# Altium PCB PCB1.PcbDoc
Units mil, origin at the board's own origin, x right, y up, seen from the top; angles counter-clockwise.
Board outline 1210 x 2270 mil, 2 copper layers (Top Layer, Bottom Layer); 36 components, 25 nets, 120 pads, 28 vias.
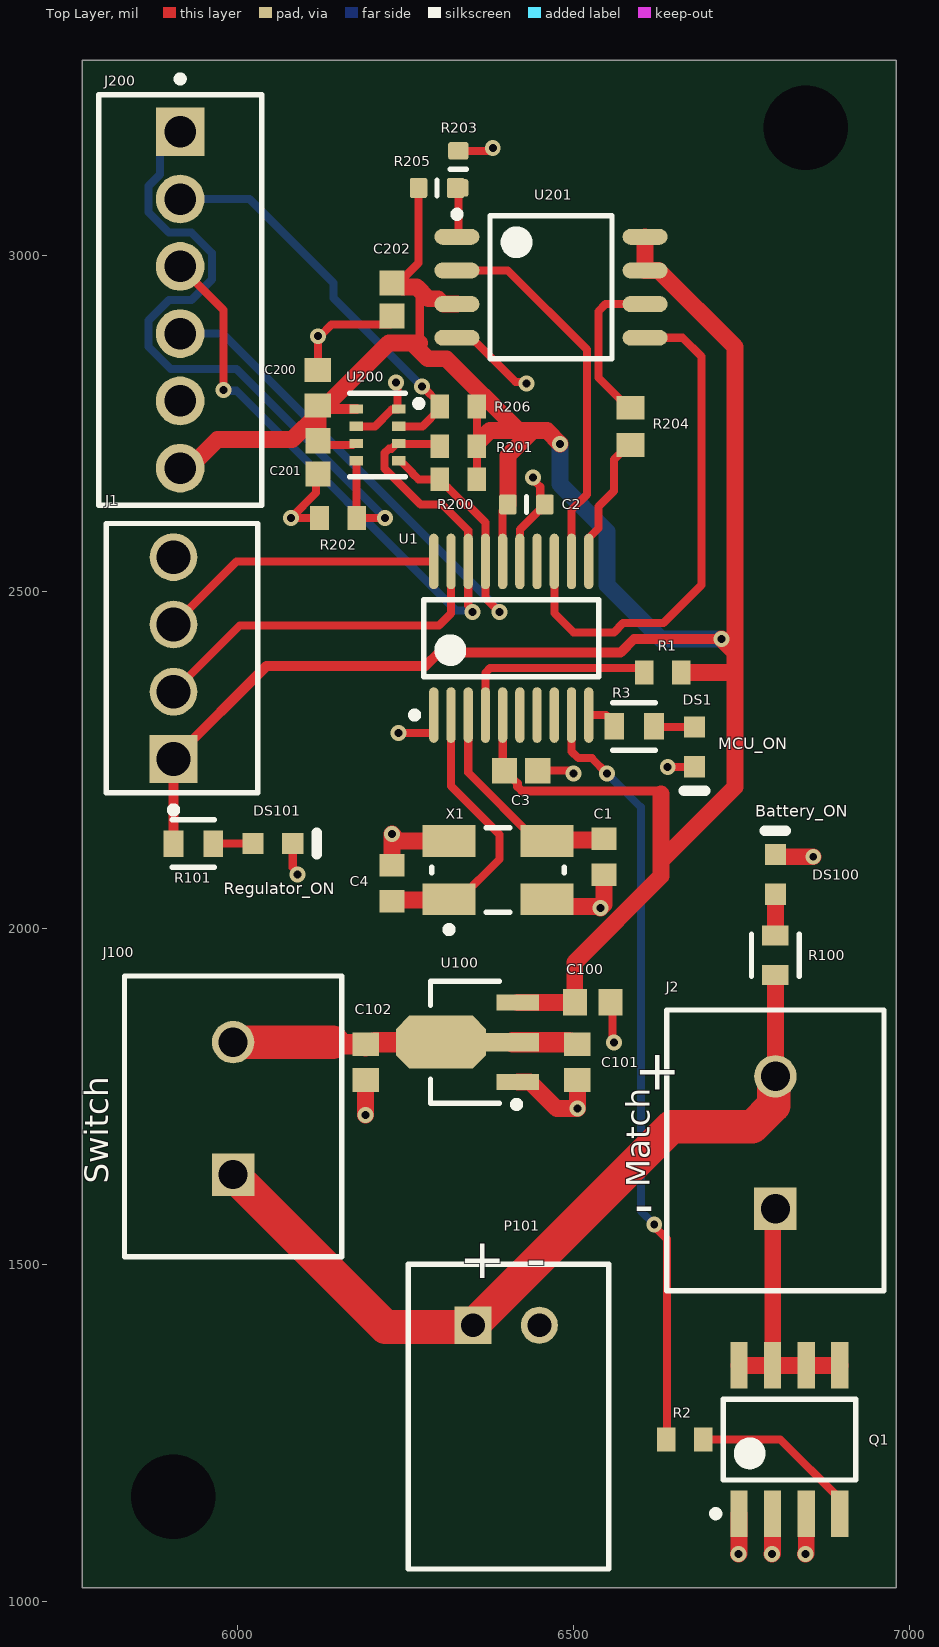
[diagram p0: Top Layer view]
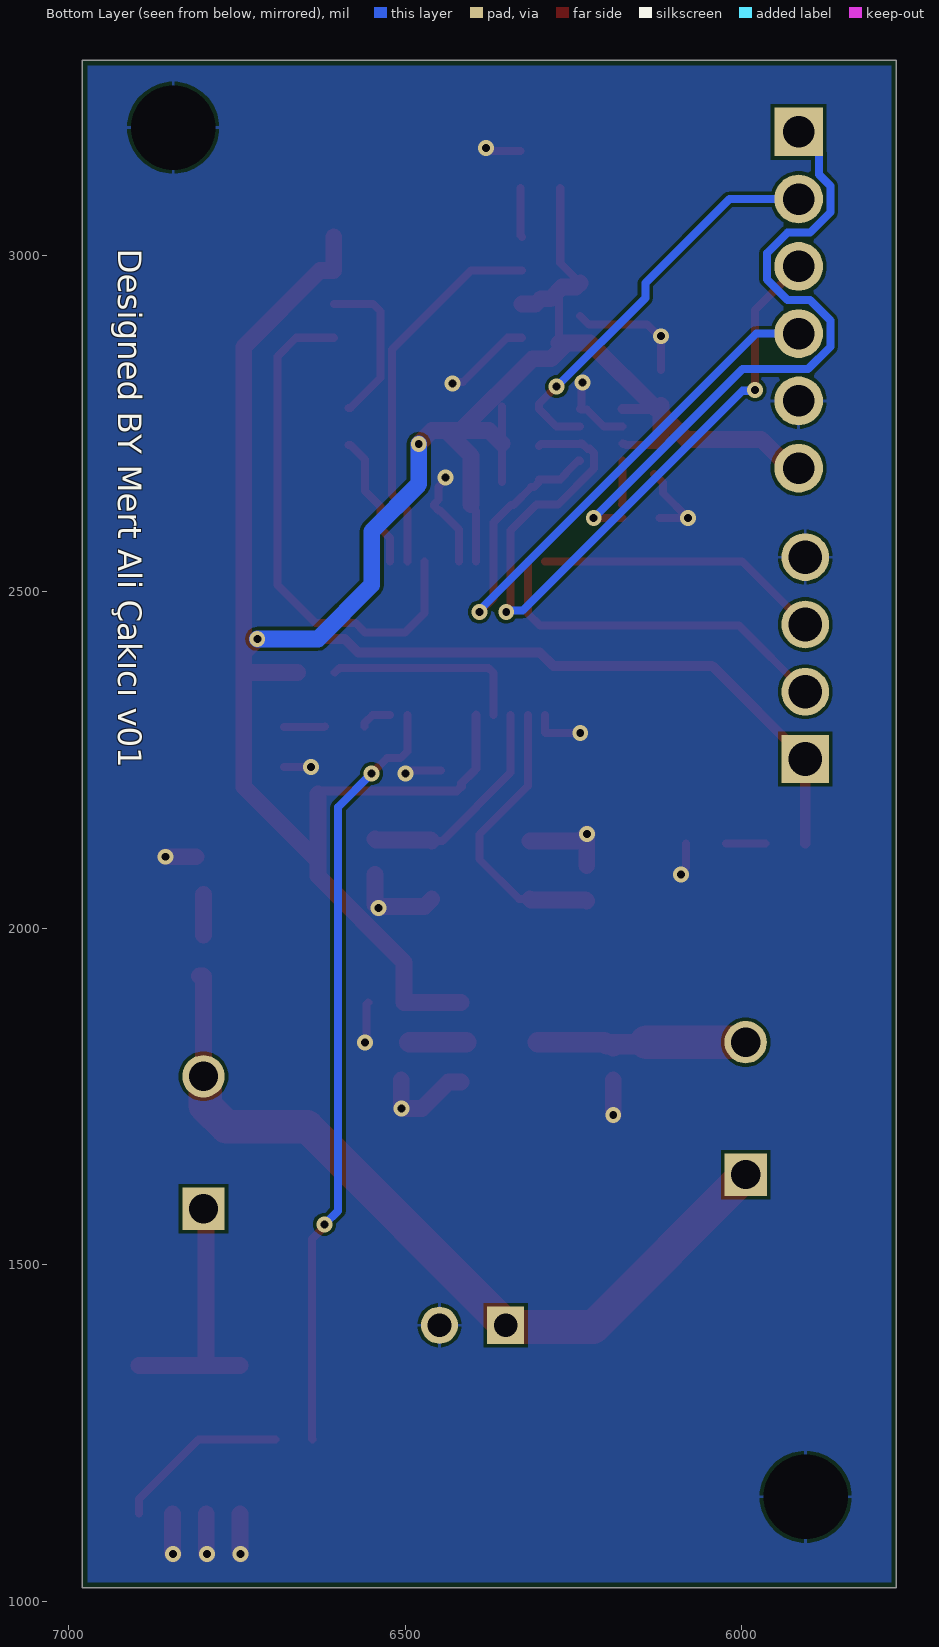
[diagram p1: Bottom Layer view, seen from below]
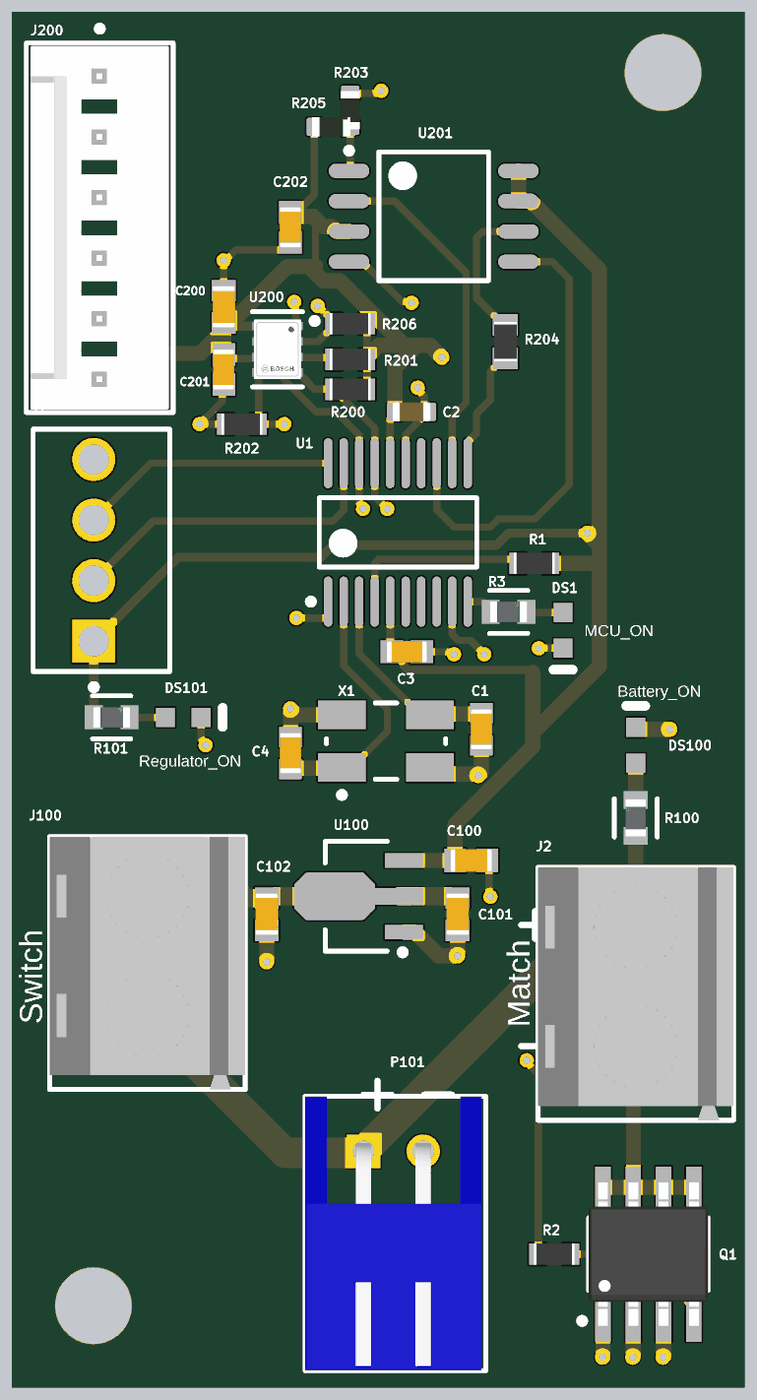
[diagram p2: 3D render of the assembled board from above, using the file's embedded part models]

## Layer stack, top to bottom
Top Solder: solder mask 0.4, Solder Resist, Dk 3.5
Top Layer: signal copper 1.4
Dielectric 1: dielectric 12.6, FR-4, Dk 4.8
Bottom Layer: signal copper 1.4
Bottom Solder: solder mask 0.4, Solder Resist, Dk 3.5

## Board outline
5770,1020 5770,3290 6980,3290 6980,1020

## Design rules (kind name [scope] priority, off if disabled: settings)
BoardOutlineClearance [All] p1: gap=7.87 ignorepadtopadclearanceinfootprint=FALSE
Clearance [All] p1: gap=5 ignorepadtopadclearanceinfootprint=FALSE except(9.84: Arc-Hole Track-Hole SMDPad-Hole THPad-Hole Via-Hole Fill-Hole Poly-Hole Region-Hole Text-Hole)
ComponentClearance [All] p1: gap=5 collisioncheckmode=3 verticalgap=5 showdistances=TRUE
DiffPairsRouting [All] p1: maxlimit=10 minlimit=5 mostfreqgap=5 toplayer_minwidth=5 toplayer_maxwidth=1000 toplayer_prefwidth=5 bottomlayer_minwidth=5 bottomlayer_maxwidth=1000 bottomlayer_prefwidth=5 maxuncoupledlength=500
Height [All] p1: minheight=0 maxheight=71497.94 prefheight=500
HoleSize [All] p1: absolutevalues=TRUE maxlimit=248.03 minlimit=11.81 maxpercent=80.000 minpercent=20.000
HoleToHoleClearance [All] p1: gap=9.84 allowstackedmicrovias=FALSE
MinimumAnnularRing [All] p1: minimumring=3
MinimumSolderMaskSliver [All] p1: minsoldermaskwidth=0
PlaneClearance [All] p1: clearance=5
PlaneConnect PlaneConnectPowerPads [InPadClass('PowerPads')] p1: planeconnectstyle=Direct reliefexpansion=20 reliefentries=4 reliefconductorwidth=10 reliefairgap=10
PlaneConnect [All] p2: pad.planeconnectstyle=Relief pad.reliefexpansion=11.81 pad.reliefentries=4 pad.reliefconductorwidth=5 pad.reliefairgap=5 via.planeconnectstyle=Direct via.reliefexpansion=11.81 via.reliefentries=4 via.reliefconductorwidth=5 via.reliefairgap=5
PolygonConnect PolygonConnectPowerPads [All vs (InPadClass('PowerPads'))] p1: connectstyle=Direct reliefconductorwidth=10 reliefentries=4 polygonreliefangle="90 Angle" airgapwidth=10
PolygonConnect [All] p2: thpad.connectstyle=Relief thpad.reliefconductorwidth=5 thpad.reliefentries=4 thpad.polygonreliefangle="90 Angle" thpad.airgapwidth=5 smdpad.connectstyle=Relief smdpad.reliefconductorwidth=5 smdpad.reliefentries=4 smdpad.polygonreliefangle="90 Angle" smdpad.airgapwidth=5 via.connectstyle=Direct via.reliefconductorwidth=5 via.reliefentries=4 via.polygonreliefangle="90 Angle" via.airgapwidth=5
RoutingVias [All] p1: holewidth=11.81 width=23.62 viastyle="Through Hole" minholewidth=11.81 minwidth=23.62 maxholewidth=23.62 maxwidth=259.84
SilkToSilkClearance [All] p1: silktosilkclearance=0
SilkToSolderMaskClearance [IsPad] p1: minsilkscreentomaskgap=5 clearancetoexposedcopper=TRUE
SolderMaskExpansion [All] p1: expansion=2.95 istentingtop=FALSE
SupplyNets "Schematic Supply Nets_1" [InNet('GND')] p1: voltage=0.000
SupplyNets "Schematic Supply Nets" [InNet('VCC')] p2: voltage=0.000
Width [All] p1: maxlimit=1000 minlimit=5 preferedwidth=5 minimp=50.000000 maximp=50.000000 favimp=50.000000
20 further rules are at their usual default settings.

## Classes and differential pairs
component class Sensor: "\"" C200 C201 C202 J200 R200 R201 R202 R203 R204 R205 R206 U200 U201
component class POWER: "\"" C100 C101 C102 DS100 DS101 J100 P101 R100 R101 U100
component class MCU: "\"" C1 C2 C3 C4 DS1 J1 J2 Q1 R1 R2 R3 U1 X1

## Components (designator, comment, footprint, x,y, rotation, side; value= is the part's Value field where it differs from the comment)
C1 "22 pF" CAPC1608X90X35NL10T15 6545.28,2106.3 r90 top
C2 "Capacitor 10µF +/-20% 10V 0603" CAPC0603(1608)100_L 6430,2630 r0 top value=10µF
C3 "Capacitor 100 nF +/-10% 50 V 0603" CAPC1608X90X40NL10T20 6422.24,2234.25 r0 top value=100nF
C4 "22 pF" CAPC1608X90X35NL10T15 6230.31,2066.93 r270 top
C100 "Capacitor 1uF +/- 10% 16V 0603" CAPC1608X90X35NL15T15 6528.54,1889.76 r0 top value=1µF
C101 "Capacitor 1uF +/- 10% 16V 0603" CAPC1608X90X35NL15T15 6505.91,1801.18 r270 top value=1µF
C102 "Capacitor 1uF +/- 10% 16V 0603" CAPC1608X90X35NL15T15 6190.94,1801.18 r270 top value=1µF
C200 "Capacitor 1uF +/- 10% 16V 0603" CAPC1608X90X35NL15T15 6120,2803.43 r90 top value=1µF
C201 "Capacitor 100 nF +/-10% 50 V 0603" CAPC1608X90X40NL10T20 6120,2700 r270 top value=100nF
C202 "Capacitor 100 nF +/-10% 50 V 0603" CAPC1608X90X40NL10T20 6230,2934.61 r270 top value=100nF
DS1 "19-217/R6C-AL1M2VY/3T" EVRL-0603-2_V 6680,2269.53 r270 top
DS100 "19-217/R6C-AL1M2VY/3T" EVRL-0603-2_V 6800,2080 r90 top
DS101 "19-217/R6C-AL1M2VY/3T" EVRL-0603-2_V 6053.15,2125.98 r0 top
J1 "640456-4" TECO-640456-4 5905.51,2401.57 r270 top
J2 "282836-2" TECO-282836-2_V 6800,1681.57 r90 top
J100 "282836-2" TECO-282836-2_V 5994.09,1732.28 r90 top
J200 "22-29-2061" FP-22-29-2061-MFG 5915.35,2933.86 r90 top
P101 "S2B-XH-A(LF)(SN)" JST-S2B-XH-A(LF)(SN)_V 6400,1410 r0 top
Q1 "FDS6690A" FAIR-SOIC-8_V 6820.87,1240.16 r90 top
R1 "Resistor 10k +/-1% 0603 100 mW" RESC1608X55X25NL10T15 6632.44,2380 r0 top value=10k
R2 "Resistor 10k +/-1% 0603 100 mW" RESC1608X55X25NL10T15 6665.35,1240.16 r0 top value=10k
R3 "220" FP-CRCW0603-e3-MFG 6590,2300 r0 top
R100 "220" FP-CRCW0603-e3-MFG 6800,1960 r90 top
R101 "220" FP-CRCW0603-e3-MFG 5935.04,2125.98 r0 top
R200 "Resistor 10k +/-1% 0603 100 mW" RESC1608X55X25NL10T15 6328.74,2667.32 r180 top value=10k
R201 "Resistor 10k +/-1% 0603 100 mW" RESC1608X55X25NL10T15 6328.74,2716.54 r180 top value=10k
R202 "Resistor 10k +/-1% 0603 100 mW" RESC1608X55X25NL10T15 6150,2610 r180 top value=10k
R203 "Jumper 0603" RESC0603(1608)_L 6328.74,3127.95 r90 top value=0
R204 "Resistor 22R +/-1% 0603 100 mW" RESC1609X50X30ML08T20 6584.65,2746.06 r270 top value=22
R205 "DNP" RESC0603(1608)_L 6297.24,3100.39 r180 top value=0
R206 "Resistor 10k +/-1% 0603 100 mW" RESC1608X55X25NL10T15 6328.74,2775.59 r180 top value=10k
U1 "STM32F042F6P6" STM-TSSOP20_M 6407.48,2431.1 r90 top
U100 "MCP1700T-3302E/MB" SOT-89-MB3_M 6338.58,1830.71 r180 top
U200 "BMP280" FP-BMP280-MFG 6208.66,2733.27 r0 top
U201 "W25Q16DVSSIG" WINB-W25Q16DVSSIG-8_N 6466.54,2952.76 r0 top
X1 "20 MHZ" TXC-7B-4_V 6387.8,2086.61 r0 top

## Footprints (in the part's own frame and the unit in brackets; to place one, negate y for a bottom-side part, rotate by r counter-clockwise, add the part's x,y. Pads: shape width x height; smd on the part's side, far side on the other; paste and mask are expansions set on the pad)
CAPC0603(1608)100_L [mm] "Chip Capacitor, Body 1.6x0.8mm, Height 1.0mm, IPC High Density"
  rrect25% 0.66x0.76 smd: 1(-0.7,0) 2(0.7,0)
  silkscreen extent 0,-0.3 0,0.3, body extent -0.8,-0.4 0.8,0.4, height 0.95
CAPC1608X90X35NL10T15 [mm] "Chip Capacitor, 2-Leads, Body 1.7x0.9mm, IPC Medium Density"
  rect 0.85x0.95 smd: 1(-0.675,0) 2(0.675,0)
  body extent -0.85,-0.45 0.85,0.45, height 0.9
CAPC1608X90X35NL15T15 [mm] "Chip Capacitor, 2-Leads, Body 1.75x0.95mm, IPC Medium Density"
  rect 0.9x1 smd: 1(-0.675,0) 2(0.675,0)
  body extent -0.87,-0.48 0.87,0.48, height 0.9
CAPC1608X90X40NL10T20 [mm] "Chip Capacitor, 2-Leads, Body 1.70x0.90mm, IPC Medium Density"
  rect 0.95x0.95 smd: 1(-0.625,0) 2(0.625,0)
  body extent -0.85,-0.45 0.85,0.45, height 0.9
EVRL-0603-2_V [mm] "SMD, 2-Leads, Body 1.6x0.8mm"
  rect 0.8x0.8 smd: 1(-0.75,0) 2(0.75,0)
  silkscreen extent 1.65,-0.4 1.65,0.4, body extent -0.8,-0.4 0.8,0.4, height 0.5
FAIR-SOIC-8_V [mm] "SOIC, 8-Leads, Body 5x4mm, Pitch 1.27mm"
  rect 1.75x0.65 smd: 1(-2.8,1.905) 2(-2.8,0.635) 3(-2.8,-0.635) 4(-2.8,-1.905) 5(2.8,-1.905) 6(2.8,-0.635) 7(2.8,0.635) 8(2.8,1.905)
  silkscreen extent -2.92,-2.5 1.53,2.9, body extent -3,-2.5 3,2.5, height 1.75
FP-22-29-2061-MFG [mm]
  rect 1.84x1.84 hole 1.19 paste-2539.97 mask+0: 1(6.35,0)
  round 1.84 hole 1.19 paste-2539.97 mask+0: 2(3.81,0) 3(1.27,0) 4(-1.27,0) 5(-3.81,0) 6(-6.35,0)
  silkscreen extent -7.75,-3.08 8.47,3.08, body extent -7.85,-3.18 7.85,3.17, height 0.25
FP-BMP280-MFG [mm]
  rect 0.5x0.35 smd paste+0 mask+0: 1(0.8,0.975) 2(0.8,0.325) 3(0.8,-0.325) 4(0.8,-0.975) 5(-0.8,-0.975) 6(-0.8,-0.325) 7(-0.8,0.325) 8(-0.8,0.975)
  silkscreen extent -1.05,-1.58 1.68,1.58, body extent -1.55,-1.8 1.55,1.8, height 0.25
FP-CRCW0603-e3-MFG [mm]
  rect 0.75x1 smd paste+0 mask+0: 1(-0.75,0) 2(0.75,0)
  silkscreen extent -0.8,-0.9 0.8,0.9, body extent -1.22,-0.6 1.22,0.6, height 0.25
JST-S2B-XH-A(LF)(SN)_V [mm] "Header, 2-Leads, Body 7.4x11.5mm, Pitch 2.5mm"
  rect 1.4x1.4 hole 0.9: 1(-1.25,0)
  round 1.4 hole 0.9: 2(1.25,0)
  silkscreen extent -3.7,-9.2 3.87,2.3, body extent -3.7,-9.2 3.7,2.3, height 5.95
RESC0603(1608)_L [mm] "Chip Resistor, Body 1.6x0.8mm, IPC High Density"
  rrect25% 0.66x0.76 smd: 1(-0.7,0) 2(0.7,0)
  silkscreen extent 0,-0.3 0,0.3, body extent -0.8,-0.4 0.8,0.4, height 0.45
RESC1608X55X25NL10T15 [mm] "Chip Resistor, 2-Leads, Body 1.70x0.90mm, IPC Medium Density"
  rect 0.7x0.9 smd: 1(-0.7,0) 2(0.7,0)
  body extent -0.85,-0.45 0.85,0.45, height 0.55
RESC1609X50X30ML08T20 [mm] "Chip Resistor, 2-Leads, Body 1.65x0.95mm, IPC Low Density"
  rect 0.9x1.05 smd: 1(-0.7,0) 2(0.7,0)
  body extent -0.82,-0.48 0.82,0.48, height 0.5
SOT-89-MB3_M [mm] "SOT89, 3-Leads, Body 4.5x2.4 mm, Pitch 1.5mm, Lead Span 4.1mm, IPC Low Density"
  rect 1.6x0.6 smd: 1(-2,1.5) 3(-2,-1.5)
  rect 2x0.7 smd: 2(-1.8,0)
  oct 3.4x2 smd: 2(0.9,0)
  silkscreen extent -2.08,-2.3 1.3,2.47, body extent -1.3,-2.3 1.3,2.3, height 1.6
STM-TSSOP20_M [mm] "SOP, 20-Leads, Body 6.6x4.5mm, Pitch 0.65mm, IPC Low Density"
  oval 2.1x0.35 smd: 1(-2.9,2.925) 2(-2.9,2.275) 3(-2.9,1.625) 4(-2.9,0.975) 5(-2.9,0.325) 6(-2.9,-0.325) 7(-2.9,-0.975) 8(-2.9,-1.625) 9(-2.9,-2.275) 10(-2.9,-2.925) 11(2.9,-2.925) 12(2.9,-2.275) 13(2.9,-1.625) 14(2.9,-0.975) 15(2.9,-0.325) 16(2.9,0.325) 17(2.9,0.975) 18(2.9,1.625) 19(2.9,2.275) 20(2.9,2.925)
  silkscreen extent -3.02,-3.3 1.45,3.77, body extent -2.25,-3.3 2.25,3.3, height 1.2
TECO-282836-2_V [mm] "Female Header, Pitch 5mm, 1 x 2 Position, Height 10mm"
  rect 1.6x1.6 hole 1.1: 1(-2.5,0)
  round 1.6 hole 1.1: 2(2.5,0)
  silkscreen extent -5.6,-4.1 5,4.1, body extent -5.6,-4.1 5,4.1, height 10
TECO-640456-4 [mm] "Through Hole, 4-Leads, Body 10.16x5.72mm, Pitch 2.54mm"
  rect 1.8x1.8 hole 1.27 paste-2539.97: 1(3.81,0)
  round 1.8 hole 1.27 paste-2539.97: 2(1.27,0) 3(-1.27,0) 4(-3.81,0)
  silkscreen extent -5.08,-2.54 5.86,3.18, body extent -5.08,-2.54 5.08,3.18, height 10.03
TXC-7B-4_V [mm] "SMD, 4-Leads, Body 5x3.2mm, Pitch 3.7mm"
  rect 2x1.2 smd: 1(-1.85,-1.1) 2(1.85,-1.1) 3(1.85,1.1) 4(-1.85,1.1)
  silkscreen extent -2.5,-2.37 2.5,1.6, body extent -2.5,-1.6 2.5,1.6, height 1.05
WINB-W25Q16DVSSIG-8_N [mm] "SOIC, 8-Leads, Body 5.4x5.4mm, Pitch 1.27mm, IPC Medium Density"
  oval 1.7x0.6 smd: 1(-3.55,1.905) 2(-3.55,0.635) 3(-3.55,-0.635) 4(-3.55,-1.905) 5(3.55,-1.905) 6(3.55,-0.635) 7(3.55,0.635) 8(3.55,1.905)
  silkscreen extent -3.67,-2.7 2.3,2.88, body extent -2.7,-2.7 2.7,2.7, height 2.16

## Part data
C1 C4: library part CMP-2000-04945-1, "Chip Capacitor, 22 pF, +/- 5%, 50 V, -55 to 125 degC, 0603 (1608 Metric), RoHS, Tape and Reel", Capacitance=22pF, Case Size/Dimension=0603, Dielectric=C0G, Manufacturer=Murata, Package Description="2-Pin Surface Mount Device, Body 1.6 x 0.8 mm", Package Reference=603, Rated Voltage=50V, Tolerance (%)=±5%, Datasheet URL=https://datasheet.ciiva.com/11786/0900766b807a1cab-11786398.pdf, Datasheet Version=Jul-06, Manufacturer URL=http://www.murata.com/
C2: library part CMP-001-00075-4, "Chip Capacitor, 10µF +/-20%, 10V, 0603, Thickness 1 mm", Case/Package=0603, Max Operating Temperature=85°C, Min Operating Temperature=-55°C, Tolerance=10%, Voltage Rating=10V, Mounting Technology=SMT, Pins=2
C3 C201 C202: library part CMP-001-00017-6, "Chip Capacitor, 100 nF, +/- 10%, 50 V, 0603 (1608 Metric)", Capacitor Type=Ceramic, Case/Package=0603, Max Operating Temperature=125°C, Min Operating Temperature=-55°C, Tolerance=10%, Voltage Rating=50V, Mounting Technology=SM, Pins=2, RoHS Compliant=True
C100 C101 C102 C200: library part CMP-001-00004-6, "Chip Capacitor, 1 uF, +/- 10%, 16 V, 0603 (1608 Metric)", Capacitor Type=Ceramic, Case/Package=0603, Max Operating Temperature=125°C, Min Operating Temperature=-55°C, Tolerance=10%, Voltage Rating=16V, Mounting Technology=SM, Pins=2, RoHS Compliant=True
DS1 DS100 DS101: library part CMP-007-00004-2, "Chip LED, Red, 5 V, 25 mA, -40 to 85 degC, 2-Pin SMD (0603), RoHS, Tape and Reel", Case/Package=0603, Colour=Red, Forward Voltage=2.2V, Manufacturer="Everlight Electronics", Package Description="2-Pin Surface Mount Device, Body 1.6 x 0.8 mm", Datasheet URL=https://datasheet.ciiva.com/4688/el-19-217-r6c-al1m2vy-3tpdf-187026-4688713.pdf, Datasheet Version="Rev. 1, 01/2005", Lens Style=Clear, Manufacturer URL=http://www.everlight.com/, Mounting Technology=SM, Package Reference=0603, RoHS Compliant=False
J1: library part CMP-2000-05419-1, "Male Header, Pitch 2.54 mm, 1 x 4 Position, Height 10.03 mm, Tail Length 3.56 mm, RoHS, Bulk", Color=White, Current, Rating="5 /  / A", Flammability Rating=UL94V-0, Manufacturer="TE Connectivity", Temperature, Operating="-55to+105 /  / degC", Voltage, Rating="250 /  / V", Agency Approvals=CSA,UL, Angle=Straight, Brand/Series=MTA-100Series, Color, Housing=White, Connector Type=MTA-100, Contact Centerline Spacing="0.100 /  / in.", Contact Mating Area Plating=Tin, Contact Plating=Tin, Contact Shape=Square, Contact Termination Area Plating=Tin, Datasheet URL=https://datasheet.ciiva.com/16286/eng-ds-82056-mta-0608-16286228.pdf, Datasheet Version=Dec-14, Length, Overall="0.4 /  / \"", Length, Pin="0.14 /  / \"", Length, Terminal Post="0.14 /  / in.", Manufacturer URL=http://www.te.com/, Material, Contact=CopperAlloy, Material, Housing=Polyester, Mount Angle=Vertical, Mounting Hole Size="0.04 /  / \"", Mounting Type=PCMount, Number of Contacts=4, Number of Positions=4, Number of Rows=1, Pin Spacing="0.1 /  / \"", Primary Type=InterconnectSystem, Size, Post="0.025 /  / in.", Special Features=Pinstrip, Standards=RoHSCompliant,ELVCompliant,UL94V-0, Termination=Solder, Type=PCBPlug
J2 J100: library part CMP-1684-00017-1, "Female Header, Pitch 5 mm, 1 x 2 Position, Height 10 mm, Tail Length 3.5 mm, Rohs, Bulk", Color=Green, Current=13.5A, Manufacturer="TE Connectivity", Package Description="Female Header, Pitch 5 mm, 1 x 2 Position, Height 10 mm, Tail Length 3.5 mm", Package Reference=THD, Standard Package=300, Voltage=300V, 3D Model=282836-2.pdf, Category=Connectors,Interconnects, Clamp Material - Plating=Brass-NickelPlated, Contact Material - Plating=Brass-TinPlated, Datasheet URL=http://www.te.com.cn/commerce/DocumentDelivery/DDEController?Action=showdoc&DocId=Catalog+Section%7F1308389_EUROSTYLE_TERMINAL_BLOCKS%7F0607%7Fpdf%7FEnglish%7FENG_CS_1308389_EUROSTYLE_TERMINAL_BLOCKS_0607.pdf%7F282836-2, Dynamic Catalog=BuchananSeries, Family=TerminalBlocks-WiretoBoard, Featured Product=EurostyleTerminalBlockConnectors, Features=Interlocking(Side), Housing Material=Polyamide(PA66),Nylon6/6, Manufacturer URL=http://www.te.com, Mating Orientation=HorizontalwithBoard, Mounting Type=ThroughHole, Number of Levels=1, Other Names="5ULV-02B / A98076", Packaging=Bulk, Pitch="0.197\"(5.00mm)", Positions Per Level=2, Product Training Modules=Wire-to-BoardEurostyleTerminalBlocks, RoHS Information=282836-2StatementofCompliance, Screw Material - Plating=Brass-NickelPlated, Screw Thread=M3, Series=Buchanan, Torque - Screw=0.68Nm(6Lb-In), Wire Gauge=16-30AWG, Wire Termination=Screw-RisingCageClamp
J200: library part CMP-04776-000348-1, "CONN HEADER VERT 6POS 2.54MM", Color=Natural, Contact Resistance=10mR, Current Rating=4A, Flammability Rating="UL94 V-0", Housing Color=White, Insulation Resistance=50GR, Max Operating Temperature=75°C, Min Operating Temperature=0°C, Package Quantity=1000, Voltage Rating=250V, Contact Gender=Male, Contact Material=Brass, Contact Mating Length=0.295inch, Contact Plating=Gold, Contact Type="Male Pin", Depth=5.8mm, Fastening Type=Friction, Gender=Male, Height=11.7mm, Housing Material=Nylon, Lead Free="Lead Free", Length=15.24mm, Max Current Rating=4A, Mount="Through Hole", Number of Contacts=6, Number of Lines=1, Number of Poles=6, Number of Positions=6, Number of Rows=1, Orientation=Straight, Packaging=Bulk, Pitch=2.54mm, Radiation Hardening=No, RoHS Compliant=Yes, Series="KK® 6410", Termination=Solder, Voltage Rating (DC)=250V
P101: library part CMP-002-00032-2, "Male Header, Pitch 2.5 mm, 1 x 2 Position, Height 6.1 mm, Tail Length 3.4 mm, -25 to 85 degC, RoHS, Bulk", Manufacturer=JST, Max Operating Temperature=85°C, Min Operating Temperature=-25°C, Package Description="XH Series Disconnectable Crimp Style Connector, Pitch 2.5 mm, 1 x 2 Position, Height 6.1 mm, Tail Length 3.4 mm", Case/Package=S2B-XH-A(LF)(SN), Connector Type=Header, Datasheet URL=http://www.jst-mfg.com/product/pdf/eng/eXH.pdf, Datasheet Version=May-16, Gender=Male, Manufacturer URL=http://www.jst.com/home2.html, Mounting Technology=TH, Package Reference=S2B-XH-A(LF)(SN), RoHS Compliant=Unknown
Q1: library part CMP-2000-06260-1, "Single N-Channel, Logic-Level, PowerTrench(R) MOSFET, 11 A, 30 V, -55 to 150 degC, 8-Pin SOIC (SO-8), RoHS, Tape and Reel", Manufacturer="Fairchild Semiconductor", Maximum Continuous Drain Current=11A, Maximum Drain Source Resistance=0.013Ω, Maximum Drain Source Voltage=30V, Maximum Gate Source Voltage=±20V, Maximum Operating Temperature=+150°C, Maximum Power Dissipation=2.5W, Minimum Gate Threshold Voltage=1V, Minimum Operating Temperature=-55°C, Package Description="8-Pin Small Outline Integrated Circuit, Body 4.9 x 3.9 mm, Pitch 1.27 mm", Package Reference=SOIC-8, Package Type=SOIC, Typical Input Capacitance @ Vds=1205pF@15V, Category=PowerMOSFET, Channel Mode=Enhancement, Channel Type=N, Datasheet URL=https://www.fairchildsemi.com/datasheets/FD/FDS6690A.pdf, Datasheet Version="Rev. E1, 02/2007", Dimensions=5x4x1.5mm, Height=1.5mm, Length=5mm, Manufacturer URL=https://www.fairchildsemi.com/, Mounting Technology=SurfaceMount, Mounting Type=SurfaceMount, Number of Elements per Chip=1, Package URL=https://www.fairchildsemi.com/package-drawings/M0/M08A.pdf, Pin Count=8, Transistor Configuration=Single, Transistor Material=Si, Typical Gate Charge @ Vgs=12nC@5V, Typical Turn-Off Delay Time=28ns, Typical Turn-On Delay Time=9ns, Width=4mm
R1 R2 R200 R201 R202 R206: library part CMP-009-00017-5, "Chip Resistor, 10 KOhm, +/- 1%, 01 W, -55 to 155 degC, 0603 (1608 Metric)", Case/Package=0603, Max Operating Temperature=155°C, Min Operating Temperature=-55°C, Power=100mW, Tolerance=1%, Voltage Rating=50V, Mounting Technology=SM, Pins=2, RoHS Compliant=True
R3 R100 R101: library part CMP-2000-03085-2, "RES Thick Film, 220Ω, 1%, 0.1W, 100ppm/°C, 0603", Case Code (Imperial)=0603, Case Code (Metric)=1608, Max Operating Temperature=155°C, Max Power Dissipation=100mW, Min Operating Temperature=-55°C, Package Quantity=10, Resistance=220R, Temperature Coefficient=100ppm/°C, Tolerance=1%, Voltage Rating=75V, Case/Package=0603, Composition="Thick Film", Contact Plating=Tin, Depth=0.85mm, Features="Automotive AEC-Q200", Height=0.45mm, Lead Free="Lead Free", Length=1.55mm, Military Standard=Not, Number of Terminations=2, Packaging="Tape and Reel", Power Rating=100mW, Radiation Hardening=No, Termination=SMD/SMT, Voltage Rating (DC)=75V, Weight=7.1E-05oz, Width=0.033inch
R203: library part CMP-009-00175-3, Case/Package=0603, Max Operating Temperature=155°C, Min Operating Temperature=-55°C, Pins=2
R204: library part CMP-009-00027-5, "Chip Resistor, 22 Ohm, +/- 1%, 100 mW, -55 to 155 degC, 0603 (1608 Metric)", Case/Package=0603, Max Operating Temperature=155°C, Min Operating Temperature=-55°C, Power=100mW, Tolerance=1%, Voltage Rating=75V, Mounting Technology=SM, Pins=2, RoHS Compliant=True
R205: library part CMP-009-00175-3, "Jumper 0603", Case/Package=0603, Max Operating Temperature=155°C, Min Operating Temperature=-55°C, Pins=2
U1: library part CMP-0304-00108-2, "ARM Cortex-M0 32-bit MCU, 32 KB Flash, 6 KB Internal RAM, 16 I/Os, 20-Pin TSSOP, -40 to 85 degC, Tube", Manufacturer=STMicroelectronics, Package Description="20-Pin Thin Shrink Small Outline Package, Body 6.5 x 4.4 mm, Pitch 0.65 mm", Package Reference=TSSOP20, ComponentLink1Description="Manufacturer URL", ComponentLink1URL=http://www.st.com/, ComponentLink2Description=Datasheet, ComponentLink2URL=http://www.st.com/st-web-ui/static/active/en/resource/technical/document/datasheet/DM00105814.pdf, Core="ARM Cortex-M0", DatasheetVersion="Rev. 5", Mounting Technology="Surface Mount", PartNumber=STM32F042F6P6
U100: library part CMP-0136-00812-1, "Low Quiescent Current LDO, 3-Pin SOT-89, Extended Temperature, Tape and Reel", Code_IPC=SOT89, DatasheetVersion="revB, Feb-2007", PackageDescription="3-Lead Plastic Small Outline Transistor Header (MB) [SOT-89]", PackageReference=SOT-89-MB3, PackageVersion="revBB, Aug-2009"
U200: library part CMP-2000-05076-3, "SENSOR PRESSURE ABS", Case/Package=SMD/SMT, Max Operating Temperature=85°C, Min Operating Temperature=-40°C, Operating Pressure=15.95PSI, Lead Free="Lead Free", Max Pressure=290.08PSI, Number of Pins=8, Output Type=SPI, Port Style="No Port", Pressure Type=Absolute, Termination=SMD/SMT
U201: library part CMP-2000-05434-1, "IC FLASH 16MBIT 104MHZ 8SOIC", Manufacturer=Winbond, Operating Supply Voltage (Max)=3.6V, Operating Supply Voltage (Min)=2.7V, Operating Supply Voltage (Typ)=3/3.3V, Operating Temp Range=-40Cto85C, Operating Temperature (Max)=85C, Operating Temperature (Min)=-40C, Operating Temperature Classification=Industrial, Package Type=SOICW, Program/Erase Volt (Typ)=2.7to3.6V, Supply Current=18mA, Access Time (Max)=7ns, Address Bus=24b, Boot Type=Bottom/Top, Cell Type=NOR, Datasheet URL=https://ciiva.com/datasheet-click-14728450?src=ciiva&sig=bd4f4644, Datasheet Version="Rev. D, 10/2012", Density=16777216Bit, Interface Type=Serial(SPI), Manufacturer URL=http://www.winbond.com/hq/index.html?__locale=en, Mounting=SurfaceMount, Number of Words=2M, Pin Count=8, Programmable=Yes, Rad Hardened=No, Sync/Async=Synchronous, Word Size=8b
X1: library part CMP-003-00011-2, "SMD Seam Sealing Crystal, 24 MHz, +/- 30 ppm, 18 pF, -10 to 70 degC, 4-Pin SMD, RoHS, Tape and Reel", Case/Package=7B-4, Frequency=24MHz, Frequency Tolerance=30ppm, Load Capacitance=18pF, Manufacturer=TXC, Max Operating Temperature=70°C, Min Operating Temperature=-20°C, Package Description="4-Pin Surface Mount Device, Body 5 x 3.2 mm, Pitch 3.7 mm", Package Quantity=1000, Resistance=40Ohm, Datasheet URL=http://www.txccorp.com/download/products/quartz_crystals/2015TXC_7B_19.pdf, Datasheet Version=Jul-15, ESR=40, Mounting Technology=SM, Package Reference=7B-4, Packaging=TapeandReel, Pins=4, RoHS Compliant=True, Tolerance=30ppm

## Free pads (board coordinates)
  round 60 hole 125.98: 2(6845,3190) ""(5905,1155)

## Via types
v1: diameter 23.62, hole 11.81, Top Layer to Bottom Layer, 28 vias

## Nets (pads, with @x,y where several pads share a name; then routed paths per layer and width w, separated by ;. In a path a pad name is that pad's centre, name@x,y a point inside that pad or via, vN(x,y) a via of type N, cw(c..) or ccw(c..) an arc to the next point about the centre after c; other vN are vias at no path point)
CLK_R: R204.1 U201.6 | length 238.6
  Top Layer w12: R204.1 6581.69,2773.62 6537,2818.32 6537,2917 6547.76,2927.76 U201.6
CS_BMP: J200.2 R206.2 U200.2 | length 604.4
  Top Layer w12: U200.2 6275.59,2746.06 6301.18,2771.65 6301.18,2779.53 6275.71,2805 v1(6275,2805)
  Bottom Layer w12: J200.2 6018.4,3083.86 6143.09,2959.17 6143.09,2936.91 v1(6275,2805)
Drain: J2.1 Q1.5 Q1.6 Q1.7 Q1.8 | length 384.5
  Top Layer w25: Q1.8 Q1.7 ; J2.1 6796.16,1579.31 6796.16,1350.69 Q1.7 ; Q1.5 Q1.6 Q1.7
GND: C1.1 C2.2 C3.2 C4.1 C100.2 C101.2 C102.2 C200.2 C201.2 C202.2 DS1.2 DS100.2 DS101.2 J1.4 J200.5 P101.2 pad. pad.2 Q1.1 Q1.2 Q1.3 R202.2 R203.2 U1.1 U1.15 U100.1 U200.1 U200.7 U201.4 X1.2 X1.4 | length 1741.8
  Top Layer w12: DS101.2 6082.68,2090.47 6090,2083.14 v1(6090,2080) ; C200.2 v1(6120,2880) 6123.14,2880 6140.44,2897.3 6227.3,2897.3 C202.2@6240,2910 ; R202.2 v1(6080,2610) 6117.3,2647.3 6117.3,2662.69 C201.2@6130,2675.39 ; U200.7 6205.01,2746.06 6229.71,2770.76 6239.11,2770.76 6240.08,2771.73 6239.07,2771.73 6238.26,2772.54 6238.26,2809.48 v1(6236.37,2811.37) ; v1(6240,2290) 6291.5,2290 6292.32,2290.82 U1.1 ; U201.4 6348.43,2877.76 6413.96,2812.22 6427.78,2812.22 v1(6430,2810) ; R203.2 6372.37,3155.51 6376.86,3160 v1(6380,3160) ; U1.15 6420.28,2592.72 6448.6,2621.04 6450.56,2621.04 6457.56,2628.04 C2.2 6450.56,2637 6450.56,2656.3 6440,2666.86 v1(6440,2670) ; C3.2 6492.6,2234.25 6496.86,2230 v1(6500,2230) ; C100.2 6557.78,1887.11 6557.78,1832.22 v1(6560,1830) ; v1(6640,2240) DS1.2
  Top Layer w25: v1(6190.94,1722.44) C102.2 ; C4.1 6230.31,2139.68 v1(6230,2140) 6240.08,2129.92 X1.4 ; U100.1 6435.63,1771.65 6475,1732.28 v1(6505.91,1732.28) C101.2 ; X1.2 6471.44,2032.5 6537.5,2032.5 v1(6540,2030) 6545.28,2035.28 C1.1 ; v1(6745,1070) 6745.87,1070.87 Q1.1 ; v1(6795,1070) 6795.87,1070.87 Q1.2 ; DS100.2@6811.02,2106.3 v1(6856.3,2106.3) ; v1(6845,1070) 6845.87,1070.87 Q1.3
LED_GPIO: R3.1 U1.10 | length 47.7
  Top Layer w12: U1.10 6548.46,2316.93 6560.47,2304.92 R3.1
MISO: U1.12 U201.2 | length 566.2
  Top Layer w12: U201.2 6402.24,2977.76 6520,2860 6520,2645 6497.05,2622.05 U1.12
MOSI: U1.13 U201.5 | length 771.5
  Top Layer w12: U1.13 6471.46,2468.54 6500.27,2439.73 6560,2439.73 6573.77,2453.5 6633.5,2453.5 6690,2510 6690,2850 6662.24,2877.76 U201.5
NetDS1_1: DS1.1 R3.2 | length 60.9
  Top Layer w12: R3.2 6620.47,2299.06 DS1.1
NetDS100_1: DS100.1 R100.2 | length 60.9
  Top Layer w25: R100.2 DS100.1
NetDS101_1: DS101.1 R101.2 | length 59.1
  Top Layer w12: R101.2 DS101.1
NetQ1_4: Q1.4 R2.2 | length 261.3
  Top Layer w12: R2.2 6807.28,1240.16 6895.87,1151.57 Q1.4
NetR203_1: R203.1 R205.1 U201.1 | length 73.5
  Top Layer w12: U201.1 6328.74,3029.72 R203.1
OSC_IN: C4.2 U1.2 X1.1 | length 429.7
  Top Layer w12: X1.1 6330.71,2043.31 6390,2102.6 6390,2139.29 6317.91,2211.38 U1.2
  Top Layer w25: C4.2 6231.79,2041.83 6313.48,2041.83 X1.1
OSC_OUT: C1.2 U1.3 X1.3 | length 330.6
  Top Layer w12: U1.3 6343.5,2231.3 6444.88,2129.92 X1.3
  Top Layer w25: X1.3 6462.11,2131.4 6543.8,2131.4 C1.2
RST: R1.1 U1.4 | length 304.5
  Top Layer w12: U1.4 6369.09,2379.84 6376.12,2386.87 6598.01,2386.87 R1.1
SCK: R204.2 U1.11 | length 200.6
  Top Layer w12: U1.11 6522.64,2580.21 6537,2594.57 6537,2627 6560,2650 6560,2696.81 6581.69,2718.5 R204.2
SCL: J200.4 R200.2 U1.17 U200.4 | length 959.3
  Top Layer w12: U200.4 6243.11,2694.88 6260.92,2677.08 6260.92,2675.81 6269.4,2667.32 R200.2 6301.18,2663.39 6308.96,2655.61 6312.9,2655.61 6339.19,2629.31 6343.13,2629.31 6369.09,2603.35 6369.09,2490.91 v1(6390,2470)
  Bottom Layer w12: J200.4 5978.4,2883.86 6390,2472.26 v1(6390,2470)
SDA: J200.3 R201.2 U1.18 U200.3 | length 1115.6
  Top Layer w12: J200.3 5980,2919.21 v1(5980,2800) ; R201.2 6298.13,2719.58 6241.05,2719.58 U200.3 6237.2,2720.47 6229.5,2712.77 6225.76,2712.77 6219.31,2706.33 6219.31,2683.44 6272.75,2630 6305,2630 6343.5,2591.5 6343.5,2479.64 6350,2473.14 v1(6350,2470)
  Bottom Layer w12: v1@5980,2798.89 5998.85,2798.89 6325.52,2472.22 6347.78,2472.22 v1(6350,2470)
SDO_BMP: J200.1 R202.1 U200.5 | length 1021.4
  Top Layer w12: U200.5 6177.36,2694.68 6177.36,2630.2 6177.56,2630 ; R202.1 v1(6220,2610)
  Bottom Layer w12: J200.1 5885.13,3153.64 5885.13,3120.42 5868.13,3103.42 5868.13,3064.3 5898.57,3033.86 5932.13,3033.86 5962.57,3003.42 5962.57,2964.3 5932.13,2933.86 5898.57,2933.86 5868.13,2903.42 5868.13,2864.3 5901.35,2831.08 5998.92,2831.08 v1(6220,2610)
SWCLK: J1.2 U1.19 | length 538
  Top Layer w12: J1.2 6003.94,2450 6300,2450 6317.91,2467.91 U1.19
SWDIO: J1.3 U1.20 | length 425.6
  Top Layer w12: J1.3 5999.21,2545.28 U1.20
Trig: R2.1 U1.9 | length 1147.7
  Top Layer w12: U1.9 6497.05,2262.95 6507.19,2252.81 6527.19,2252.81 v1(6550,2230) ; v1(6620,1560) 6620,1556.86 6638.9,1537.96 6638.9,1241.26 R2.1
  Bottom Layer w12: v1(6550,2230) 6600,2180 6600,1580 v1(6620,1560)
V_bat: J2.2 J100.1 P101.1 R100.1 | length 1229
  Top Layer w25: J2.2 6800,1928.21 6800.93,1929.13 R100.1@6806.1,1929.13
  Top Layer w50: J100.1 6220.51,1407.44 P101.1@6348.23,1407.44 ; P101.1 6645.79,1705 6765.81,1705 6797.51,1736.7 6797.51,1777.51 J2.2
VCC: C2.1 C3.1 C100.1 C200.1 C201.1 C202.1 J1.1 J200.6 R1.2 R101.1 R200.1 R201.1 R205.2 R206.1 U1.5 U1.16 U100.3 U200.6 U200.8 U201.3 U201.7 U201.8 | length 4992.1
  Top Layer w12: C201.1 6126.44,2718.17 6171.91,2718.17 6173.32,2719.58 6176.28,2719.58 U200.6 ; C202.1@6240,2959.21 6269.69,2988.9 R205.2 ; 6266.99,2953.01 6271.42,2948.58 6271.42,2870 ; R200.1@6356.3,2663.39 R200.1 R201.1 6356.3,2720.47 R206.1 ; U1.16 6394.69,2620.28 6402.44,2628.04 C2.1
  Top Layer w13: U1.5 6394.83,2316.78 6394.83,2237.06 C3.1 6416.65,2215.24 6416.65,2210.79 6423.39,2204.05 6625.95,2204.05 6630,2200
  Top Layer w15: R101.1 J1.1 6043.94,2390 6280,2390 6300,2410 6570,2410 6590,2430 v1(6720,2430) ; C200.1@6127.7,2772.3 6128.35,2771.65 U200.8
  Top Layer w25: J200.6 5928.19,2683.86 5970.91,2726.57 6080,2726.57 ; 6081.97,2726.57 C200.1@6120,2764.61 ; C201.1 C200.1@6120,2764.61 ; C200.1 C200.1@6120,2764.61 ; C202.1@6240,2959.21 6246.2,2953.01 6266.99,2953.01 6284.39,2935.61 6298.64,2935.61 6306.5,2927.76 U201.3 ; 6262.04,2867.96 6283.59,2846.41 6311.15,2846.41 6417.91,2739.64 ; 6271.42,2870 6225.39,2870 6127.7,2772.3 C200.1@6120,2764.61 ; R201.1@6356.3,2720.47 6375.47,2739.64 6417.91,2739.64 ; C2.1 6402.44,2702.44 6439.64,2739.64 ; U100.3 C100.1 6501.97,1949.54 6630,2077.57 6630,2100 ; v1(6480,2720) 6460.36,2739.64 6439.64,2739.64 ; U201.8 U201.7 6626.57,2977.76 6740,2864.33 6740,2410 ; 6630,2200 6630,2100 ; R1.2 6740,2380 ; v1(6720,2430) 6740,2410 ; 6417.91,2739.64 6439.64,2739.64 ; 6630,2100 6740,2210 6740,2380 ; 6740,2380 6740,2410
  Bottom Layer w25: v1(6480,2720) 6480,2660 6550,2590 6550,2510 6630,2430 v1(6720,2430)
Vin: C101.1 C102.1 J100.2 U100.2 | length 398.6
  Top Layer w30: 6141.73,1830.71 6144.92,1827.52 6188.23,1827.52 6190.94,1824.8 6193.66,1827.52 6201.06,1827.52 6204.25,1830.71 U100.2@6303.15,1830.71 ; U100.2@6409.45,1830.71 C101.1@6494.09,1830.71
  Top Layer w50: J100.2 6141.73,1830.71
pads on no net: U1.6 U1.7 U1.8 U1.14

## Polygon pours and split planes (outlines as drawn)
GND on Bottom Layer "GND_L02_P000" (solid, remove dead copper, pour order 0): 5770,3290 5770,1020 6980,1020 6980,3290

## Silkscreen, mask and mechanical layers (free items; w line width, h text height)
Top Overlay:
  text "MCU_ON" at 6715,2260 h30
  text "Battery_ON" at 6770,2160 h30
  text "Regulator_ON" at 5980,2045 h30
  text "+" at 6590,1760 h60
  text "Switch" at 5820,1620 h60 r90
  text "Match" at 6625,1615 h60 r90
  text "-" at 6590,1560.01 h60
  text "+" at 6330,1480 h60
  text "-" at 6430,1480.01 h60
Bottom Overlay:
  text "Designed BY Mert Ali Çakıcı v01" at 6938.35,3010 h60 r90